# Altium PCB Motherboard.PcbDoc (part 2 of 2)
Units mm, origin at the board's own origin, x right, y up, seen from the top; angles counter-clockwise.
Board outline 131 x 71 mm, 4 copper layers (Top Layer, Power, Ground, Bottom Layer), stack 0.603 mm thick; 135 components, 79 nets, 354 pads, 162 vias.
Unrouted connection lines stored in the file: 81.
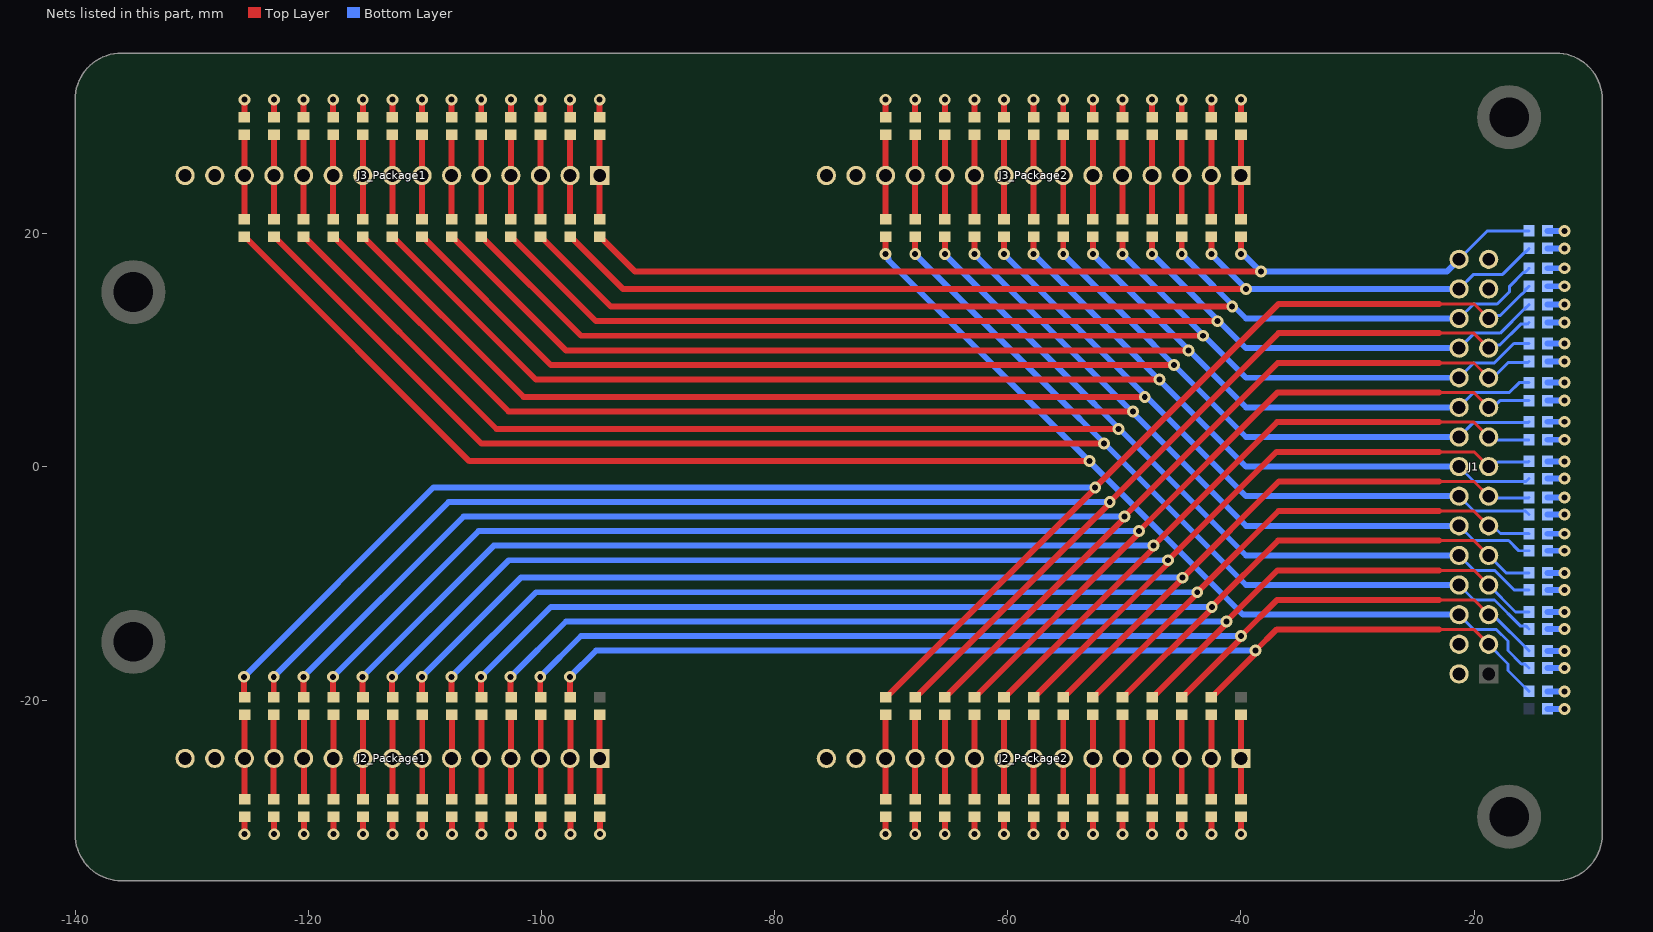
[diagram p3: the nets of this part, all layers, seen from the top]

## Via types
v1: diameter 1.016, hole 0.508, Top Layer to Bottom Layer, tented both sides, 162 vias

## Nets (pads, with @x,y where several pads share a name; then routed paths per layer and width w, separated by ;. In a path a pad name is that pad's centre, name@x,y a point inside that pad or via, vN(x,y) a via of type N, cw(c..) or ccw(c..) an arc to the next point about the centre after c; other vN are vias at no path point) (continued)
Decap_In2: C1_Decaps2.1 J1.3 R1_Resistors2.1 R1_Resistors28.1 | length 93.6
  Top Layer w0.254: -23,-13.925 -20.035,-13.925 J1.3@-18.75,-15.21
  Top Layer w0.508: R1_Resistors2.1@-97.56,-19.5 v1(-97.56,-18) ; R1_Resistors28.1@-42.54,-19.75 -42.49,-19.75 -38.847,-16.107 -38.847,-15.847 v1(-38.75,-15.75) -36.925,-13.925 -23,-13.925
  Bottom Layer w0.254: J1.3@-18.75,-15.233 -17.089,-16.893 -17.089,-17.462 -15.674,-18.877 -15.648,-18.877 -15.311,-19.214 C1_Decaps2.1@-15.311,-19.25
  Bottom Layer w0.508: v1(-97.56,-18) -95.31,-15.75 v1(-38.75,-15.75)
Decap_In3: C1_Decaps3.1 J1.5 R1_Resistors3.1 R1_Resistors29.1 | length 98.3
  Top Layer w0.254: -23,-11.398 -20.022,-11.398 J1.5@-18.75,-12.67
  Top Layer w0.508: R1_Resistors3.1@-100.1,-19.5 v1(-100.1,-18) ; R1_Resistors29.1@-45.08,-19.75 -45.03,-19.75 -40.097,-14.817 -40.097,-14.597 v1(-40,-14.5) -36.898,-11.398 -23,-11.398
  Bottom Layer w0.254: J1.5@-18.75,-12.67 -18.397,-12.67 -15.3,-15.767 C1_Decaps3.1@-15.3,-15.792
  Bottom Layer w0.508: v1(-100.1,-18) -96.6,-14.5 v1(-40,-14.5)
Decap_In4: C1_Decaps4.1 J1.7 R1_Resistors4.1 R1_Resistors30.1 | length 103.3
  Top Layer w0.254: -23,-8.868 -20.012,-8.868 J1.7@-18.75,-10.13
  Top Layer w0.508: R1_Resistors4.1@-102.64,-19.5 v1(-102.64,-18) ; R1_Resistors30.1@-47.62,-19.75 -47.57,-19.75 -41.347,-13.527 -41.347,-13.347 v1(-41.25,-13.25) -36.868,-8.868 -23,-8.868
  Bottom Layer w0.254: J1.7@-18.75,-10.13 -16.443,-12.437 C1_Decaps4.1@-15.3,-12.437
  Bottom Layer w0.508: v1(-102.64,-18) -97.89,-13.25 v1(-41.25,-13.25)
Decap_In5: C1_Decaps5.1 J1.9 R1_Resistors5.1 R1_Resistors31.1 | length 108.3
  Top Layer w0.254: -23,-6.316 -20.024,-6.316 J1.9@-18.75,-7.59
  Top Layer w0.508: R1_Resistors5.1@-105.18,-19.5 v1(-105.18,-18) ; R1_Resistors31.1@-50.16,-19.75 -50.11,-19.75 -42.597,-12.237 -42.597,-12.097 v1(-42.5,-12) -36.816,-6.316 -23,-6.316
  Bottom Layer w0.254: J1.9@-18.75,-7.59 -17.257,-9.083 C1_Decaps5.1@-15.3,-9.083
  Bottom Layer w0.508: v1(-105.18,-18) -99.18,-12 v1(-42.5,-12)
Decap_In6: C1_Decaps6.1 J1.11 R1_Resistors6.1 R1_Resistors32.1 | length 113.4
  Top Layer w0.254: -23,-3.774 -20.026,-3.774 J1.11@-18.75,-5.05
  Top Layer w0.508: R1_Resistors6.1@-107.72,-19.5 v1(-107.72,-18) ; R1_Resistors32.1@-52.7,-19.75 -52.65,-19.75 -43.75,-10.85 v1(-43.75,-10.75) -36.774,-3.774 -23,-3.774
  Bottom Layer w0.254: J1.11@-18.75,-5.05 -18.403,-5.05 -17.748,-5.704 -15.325,-5.704 C1_Decaps6.1@-15.3,-5.729
  Bottom Layer w0.508: v1(-107.72,-18) -100.47,-10.75 v1(-43.75,-10.75)
Decap_In7: C1_Decaps7.1 J1.13 R1_Resistors7.1 R1_Resistors33.1 | length 118.5
  Top Layer w0.254: -23,-1.244 -20.016,-1.244 J1.13@-18.75,-2.51
  Top Layer w0.508: R1_Resistors7.1@-110.26,-19.5 v1(-110.26,-18) ; R1_Resistors33.1@-55.24,-19.75 -55.19,-19.75 -45,-9.56 v1(-45,-9.5) -36.744,-1.244 -23,-1.244
  Bottom Layer w0.254: J1.13@-18.75,-2.51 -18.583,-2.677 -15.352,-2.677 C1_Decaps7.1@-15.3,-2.625
  Bottom Layer w0.508: v1(-110.26,-18) -101.76,-9.5 v1(-45,-9.5)
Decap_In8: C1_Decaps8.1 J1.15 R1_Resistors8.1 R1_Resistors34.1 | length 124.3
  Top Layer w0.254: -23,1.297 -20.017,1.297 J1.15@-18.75,0.03
  Top Layer w0.508: R1_Resistors8.1@-112.8,-19.5 v1(-112.8,-18) ; R1_Resistors34.1@-57.78,-19.75 -57.73,-19.75 -46.347,-8.367 -46.347,-8.097 v1(-46.25,-8) -36.953,1.297 -23,1.297
  Bottom Layer w0.254: J1.15@-18.75,0.03 -18.372,0.03 -17.972,0.431 -15.348,0.431 C1_Decaps8.1@-15.3,0.479
  Bottom Layer w0.508: v1(-112.8,-18) -102.8,-8 v1(-46.25,-8)
Decap_In9: C1_Decaps9.1 J1.17 R1_Resistors9.1 R1_Resistors35.1 | length 129.5
  Top Layer w0.254: -23,3.838 -20.018,3.838 J1.17@-18.75,2.57
  Top Layer w0.508: R1_Resistors9.1@-115.34,-19.5 v1(-115.34,-18) ; R1_Resistors35.1@-60.32,-19.75 -60.27,-19.75 -47.597,-7.077 -47.597,-6.847 v1(-47.5,-6.75) -36.912,3.838 -23,3.838
  Bottom Layer w0.254: J1.17@-18.75,2.57 -18.498,2.318 C1_Decaps9.1@-15.316,2.318
  Bottom Layer w0.508: v1(-115.34,-18) -104.09,-6.75 v1(-47.5,-6.75)
Decap_In10: C1_Decaps10.1 J1.19 R1_Resistors10.1 R1_Resistors36.1 | length 135.1
  Top Layer w0.254: -23,6.368 -20.008,6.368 J1.19@-18.75,5.11
  Top Layer w0.508: R1_Resistors10.1@-117.88,-19.5 v1(-117.88,-18) ; R1_Resistors36.1@-62.86,-19.75 -62.81,-19.75 -48.847,-5.787 -48.847,-5.597 v1(-48.75,-5.5) -36.882,6.368 -23,6.368
  Bottom Layer w0.254: J1.19@-18.75,5.11 -18.372,5.11 -17.795,5.687 C1_Decaps10.1@-15.3,5.687
  Bottom Layer w0.508: v1(-117.88,-18) -105.38,-5.5 v1(-48.75,-5.5)
Decap_In11: C1_Decaps11.1 J1.21 R1_Resistors11.1 R1_Resistors37.1 | length 140.8
  Top Layer w0.254: -23,8.909 -20.009,8.909 J1.21@-18.75,7.65
  Top Layer w0.508: R1_Resistors11.1@-120.42,-19.5 v1(-120.42,-18) ; R1_Resistors37.1@-65.4,-19.75 -65.35,-19.75 -50.097,-4.497 -50.097,-4.347 v1(-50,-4.25) -36.841,8.909 -23,8.909
  Bottom Layer w0.254: J1.21@-18.75,7.65 -18.386,7.65 -17.073,8.963 -15.379,8.963 C1_Decaps11.1@-15.3,9.042
  Bottom Layer w0.508: v1(-120.42,-18) -106.67,-4.25 v1(-50,-4.25)
Decap_In12: C1_Decaps12.1 J1.23 R1_Resistors12.1 R1_Resistors38.1 | length 146.5
  Top Layer w0.254: -23,11.473 -20.033,11.473 J1.23@-18.75,10.19
  Top Layer w0.508: R1_Resistors12.1@-122.96,-19.5 v1(-122.96,-18) ; R1_Resistors38.1@-67.94,-19.75 -67.89,-19.75 -51.25,-3.11 v1(-51.25,-3) -36.777,11.473 -23,11.473
  Bottom Layer w0.254: J1.23@-18.75,10.19 -18.483,10.457 -17.793,10.457 -16.007,12.243 -15.453,12.243 C1_Decaps12.1@-15.3,12.396
  Bottom Layer w0.508: v1(-122.96,-18) -107.96,-3 v1(-51.25,-3)
Decap_In13: C1_Decaps13.1 J1.25 R1_Resistors13.1 R1_Resistors39.1 | length 152.2
  Top Layer w0.254: -23,13.991 -20.011,13.991 J1.25@-18.75,12.73
  Top Layer w0.508: R1_Resistors13.1@-125.5,-19.5 v1(-125.5,-18) ; R1_Resistors39.1@-70.48,-19.75 -70.43,-19.75 -52.5,-1.82 v1(-52.5,-1.75) -36.759,13.991 -23,13.991
  Bottom Layer w0.254: J1.25@-18.75,12.73 -18.483,12.997 -17.754,12.997 -15.933,14.818 -15.886,14.818 -15.648,15.056 -15.648,15.152 C1_Decaps13.1@-15.3,15.5
  Bottom Layer w0.508: v1(-125.5,-18) -109.25,-1.75 v1(-52.5,-1.75)
Decap_In14: C1_Decaps14.1 J1.30 R1_Resistors14.1 R1_Resistors40.1 | length 86.2
  Top Layer w0.508: R1_Resistors14.1@-95,19.75 -94.95,19.75 -91.95,16.75 v1(-38.294,16.75) ; v1(-40,18.25) R1_Resistors40.1@-40,19.75
  Bottom Layer w0.254: J1.30@-21.29,17.81 -18.85,20.25 C1_Decaps14.1@-15.3,20.25
  Bottom Layer w0.508: v1(-40,18.25) -39.794,18.25 v1(-38.294,16.75) -22.35,16.75 J1.30@-21.29,17.81
Decap_In15: C1_Decaps15.1 J1.28 R1_Resistors15.1 R1_Resistors41.1 | length 91.3
  Top Layer w0.508: R1_Resistors15.1@-97.54,19.75 -97.49,19.75 -93.01,15.27 v1(-39.56,15.27) ; v1(-42.54,18.25) R1_Resistors41.1@-42.54,19.75
  Bottom Layer w0.254: J1.28@-21.29,15.27 -20.038,16.522 -17.551,16.522 -15.696,18.377 -15.648,18.377 -15.3,18.725 C1_Decaps15.1@-15.3,18.748
  Bottom Layer w0.508: v1(-42.54,18.25) v1(-39.56,15.27) J1.28@-21.29,15.27
Decap_In16: C1_Decaps16.1 J1.26 R1_Resistors16.1 R1_Resistors42.1 | length 97.5
  Top Layer w0.508: R1_Resistors16.1@-100.08,19.75 -100.03,19.75 -94.03,13.75 v1(-40.75,13.75) ; v1(-45.08,18.25) R1_Resistors42.1@-45.08,19.75
  Bottom Layer w0.254: J1.26@-21.29,12.73 -20.038,13.982 -18.019,13.982 -16.954,15.047 -16.954,15.505 -15.79,16.669 -15.648,16.669 -15.3,17.017 C1_Decaps16.1@-15.3,17.042
  Bottom Layer w0.508: v1(-45.08,18.25) -39.56,12.73 J1.26@-21.29,12.73
Decap_In17: C1_Decaps17.1 J1.24 R1_Resistors17.1 R1_Resistors43.1 | length 102.3
  Top Layer w0.508: R1_Resistors17.1@-102.62,19.75 -102.57,19.75 -95.32,12.5 v1(-42,12.5) ; v1(-47.62,18.25) R1_Resistors43.1@-47.62,19.75
  Bottom Layer w0.254: J1.24@-21.29,10.19 -21.274,10.19 -19.995,11.469 -17.768,11.469 -15.673,13.564 -15.648,13.564 -15.3,13.912 C1_Decaps17.1@-15.3,13.937
  Bottom Layer w0.508: v1(-47.62,18.25) -39.56,10.19 J1.24@-21.29,10.19
Decap_In18: C1_Decaps18.1 J1.22 R1_Resistors18.1 R1_Resistors44.1 | length 107.4
  Top Layer w0.508: R1_Resistors18.1@-105.16,19.75 -105.11,19.75 -96.61,11.25 v1(-43.25,11.25) ; v1(-50.16,18.25) R1_Resistors44.1@-50.16,19.75
  Bottom Layer w0.254: J1.22@-21.29,7.65 -20.008,8.932 -18.246,8.932 -16.594,10.583 C1_Decaps18.1@-15.3,10.583
  Bottom Layer w0.508: v1(-50.16,18.25) -39.56,7.65 J1.22@-21.29,7.65
Decap_In19: C1_Decaps19.1 J1.20 R1_Resistors19.1 R1_Resistors45.1 | length 112.5
  Top Layer w0.508: R1_Resistors19.1@-107.7,19.75 -107.65,19.75 -97.9,10 v1(-44.5,10) ; v1(-52.7,18.25) R1_Resistors45.1@-52.7,19.75
  Bottom Layer w0.254: J1.20@-21.29,5.11 -20.022,6.378 -16.989,6.378 -16.137,7.229 C1_Decaps19.1@-15.3,7.229
  Bottom Layer w0.508: v1(-52.7,18.25) -39.56,5.11 J1.20@-21.29,5.11
Decap_In20: C1_Decaps20.1 J1.18 R1_Resistors20.1 R1_Resistors46.1 | length 117.5
  Top Layer w0.508: R1_Resistors20.1@-110.24,19.75 -110.19,19.75 -99.19,8.75 v1(-45.75,8.75) ; v1(-55.24,18.25) R1_Resistors46.1@-55.24,19.75
  Bottom Layer w0.254: J1.18@-21.29,2.57 -20.035,3.825 -15.35,3.825 C1_Decaps20.1@-15.3,3.875
  Bottom Layer w0.508: v1(-55.24,18.25) -39.56,2.57 J1.18@-21.29,2.57
Decap_In21: C1_Decaps21.1 J1.16 R1_Resistors21.1 R1_Resistors47.1 | length 123
  Top Layer w0.508: R1_Resistors21.1@-112.78,19.75 -112.73,19.75 -100.48,7.5 v1(-47,7.5) ; v1(-57.78,18.25) R1_Resistors47.1@-57.78,19.75
  Bottom Layer w0.254: J1.16@-21.29,0.03 -20.011,-1.249 -15.549,-1.249 C1_Decaps21.1@-15.3,-1
  Bottom Layer w0.508: v1(-57.78,18.25) -39.56,0.03 J1.16@-21.29,0.03
Decap_In22: C1_Decaps22.1 J1.14 R1_Resistors22.1 R1_Resistors48.1 | length 128.5
  Top Layer w0.508: R1_Resistors22.1@-115.32,19.75 -115.27,19.75 -101.52,6 v1(-48.25,6) ; v1(-60.32,18.25) R1_Resistors48.1@-60.32,19.75
  Bottom Layer w0.254: J1.14@-21.29,-2.51 -20.022,-3.778 -15.605,-3.778 C1_Decaps22.1@-15.3,-4.083
  Bottom Layer w0.508: v1(-60.32,18.25) -39.56,-2.51 J1.14@-21.29,-2.51
Decap_In23: C1_Decaps23.1 J1.12 R1_Resistors23.1 R1_Resistors49.1 | length 134.4
  Top Layer w0.508: R1_Resistors23.1@-117.86,19.75 -117.81,19.75 -102.81,4.75 v1(-49.25,4.75) ; v1(-62.86,18.25) R1_Resistors49.1@-62.86,19.75
  Bottom Layer w0.254: J1.12@-21.29,-5.05 -20.022,-6.318 -17.04,-6.318 -16.171,-7.188 C1_Decaps23.1@-15.3,-7.188
  Bottom Layer w0.508: v1(-62.86,18.25) -39.56,-5.05 J1.12@-21.29,-5.05
Decap_In24: C1_Decaps24.1 J1.10 R1_Resistors24.1 R1_Resistors50.1 | length 140.3
  Top Layer w0.508: R1_Resistors24.1@-120.4,19.75 -120.35,19.75 -103.85,3.25 v1(-50.5,3.25) ; v1(-65.4,18.25) R1_Resistors50.1@-65.4,19.75
  Bottom Layer w0.254: J1.10@-21.29,-7.59 -20.011,-8.869 -18.245,-8.869 -16.572,-10.542 C1_Decaps24.1@-15.3,-10.542
  Bottom Layer w0.508: v1(-65.4,18.25) -39.56,-7.59 J1.10@-21.29,-7.59
Decap_In25: C1_Decaps25.1 J1.8 R1_Resistors25.1 R1_Resistors51.1 | length 146
  Top Layer w0.508: R1_Resistors25.1@-122.94,19.75 -122.89,19.75 -105.14,2 v1(-51.75,2) ; v1(-67.94,18.25) R1_Resistors51.1@-67.94,19.75
  Bottom Layer w0.254: J1.8@-21.29,-10.13 -20.012,-11.408 -18.26,-11.408 -16.007,-13.661 -15.535,-13.661 C1_Decaps25.1@-15.3,-13.896
  Bottom Layer w0.508: v1(-67.94,18.25) -39.56,-10.13 J1.8@-21.29,-10.13
Decap_In26: C1_Decaps26.1 J1.6 R1_Resistors26.1 R1_Resistors52.1 | length 152.5
  Top Layer w0.508: R1_Resistors26.1@-125.48,19.75 -125.43,19.75 -106.18,0.5 v1(-53,0.5) ; v1(-70.48,18.25) R1_Resistors52.1@-70.48,19.75
  Bottom Layer w0.254: J1.6@-21.29,-12.67 -20.026,-13.934 -18.094,-13.934 -17.092,-14.936 -17.092,-15.752 -15.95,-16.894 -15.648,-16.894 -15.3,-17.242 C1_Decaps26.1@-15.3,-17.25
  Bottom Layer w0.508: v1(-70.48,18.25) -70.48,18.113 -70.226,17.859 -70.226,17.726 v1(-53,0.5) -39.83,-12.67 J1.6@-21.29,-12.67
GND: C1_Decaps1.2 C1_Decaps2.2 C1_Decaps3.2 C1_Decaps4.2 C1_Decaps5.2 C1_Decaps6.2 C1_Decaps7.2 C1_Decaps8.2 C1_Decaps9.2 C1_Decaps10.2 C1_Decaps11.2 C1_Decaps12.2 C1_Decaps13.2 C1_Decaps14.2 C1_Decaps15.2 C1_Decaps16.2 C1_Decaps17.2 C1_Decaps18.2 C1_Decaps19.2 C1_Decaps20.2 C1_Decaps21.2 C1_Decaps22.2 C1_Decaps23.2 C1_Decaps24.2 C1_Decaps25.2 C1_Decaps26.2 J1.2 J1.4 J1.27 J1.29 J2_Package1.14 J2_Package1.15 J2_Package2.14 J2_Package2.15 J3_Package1.14 J3_Package1.15 J3_Package2.14 J3_Package2.15 R2_Resistors1.2 R2_Resistors2.2 R2_Resistors3.2 R2_Resistors4.2 R2_Resistors5.2 R2_Resistors6.2 R2_Resistors7.2 R2_Resistors8.2 R2_Resistors9.2 R2_Resistors10.2 R2_Resistors11.2 R2_Resistors12.2 R2_Resistors13.2 R2_Resistors14.2 R2_Resistors15.2 R2_Resistors16.2 R2_Resistors17.2 R2_Resistors18.2 R2_Resistors19.2 R2_Resistors20.2 R2_Resistors21.2 R2_Resistors22.2 R2_Resistors23.2 R2_Resistors24.2 R2_Resistors25.2 R2_Resistors26.2 R2_Resistors27.2 R2_Resistors28.2 R2_Resistors29.2 R2_Resistors30.2 R2_Resistors31.2 R2_Resistors32.2 R2_Resistors33.2 R2_Resistors34.2 R2_Resistors35.2 R2_Resistors36.2 R2_Resistors37.2 R2_Resistors38.2 R2_Resistors39.2 R2_Resistors40.2 R2_Resistors41.2 R2_Resistors42.2 R2_Resistors43.2 R2_Resistors44.2 R2_Resistors45.2 R2_Resistors46.2 R2_Resistors47.2 R2_Resistors48.2 R2_Resistors49.2 R2_Resistors50.2 R2_Resistors51.2 R2_Resistors52.2 | length 115.7
  Top Layer w0.508: R2_Resistors26.2@-125.48,30 v1(-125.48,31.5) ; v1(-125.459,-31.5) R2_Resistors13.2@-125.459,-30 ; R2_Resistors25.2@-122.94,30 v1(-122.94,31.5) ; v1(-122.919,-31.5) R2_Resistors12.2@-122.919,-30 ; R2_Resistors24.2@-120.4,30 v1(-120.4,31.5) ; v1(-120.379,-31.5) R2_Resistors11.2@-120.379,-30 ; R2_Resistors23.2@-117.86,30 v1(-117.86,31.5) ; v1(-117.839,-31.5) R2_Resistors10.2@-117.839,-30 ; R2_Resistors22.2@-115.32,30 v1(-115.32,31.5) ; v1(-115.299,-31.5) R2_Resistors9.2@-115.299,-30 ; R2_Resistors21.2@-112.78,30 v1(-112.78,31.5) ; v1(-112.759,-31.5) R2_Resistors8.2@-112.759,-30 ; R2_Resistors20.2@-110.24,30 v1(-110.24,31.5) ; v1(-110.219,-31.5) R2_Resistors7.2@-110.219,-30 ; R2_Resistors19.2@-107.7,30 v1(-107.7,31.5) ; v1(-107.679,-31.5) R2_Resistors6.2@-107.679,-30 ; R2_Resistors18.2@-105.16,30 v1(-105.16,31.5) ; v1(-105.139,-31.5) R2_Resistors5.2@-105.139,-30 ; R2_Resistors17.2@-102.62,30 v1(-102.62,31.5) ; v1(-102.599,-31.5) R2_Resistors4.2@-102.599,-30 ; R2_Resistors16.2@-100.08,30 v1(-100.08,31.5) ; v1(-100.059,-31.5) R2_Resistors3.2@-100.059,-30 ; R2_Resistors15.2@-97.54,30 v1(-97.54,31.5) ; v1(-97.519,-31.5) R2_Resistors2.2@-97.519,-30 ; R2_Resistors14.2@-95,30 v1(-95,31.5) ; v1(-94.979,-31.5) R2_Resistors1.2@-94.979,-30 ; v1(-70.48,-31.5) R2_Resistors39.2@-70.48,-30 ; R2_Resistors52.2@-70.48,30 v1(-70.48,31.5) ; v1(-67.94,-31.5) R2_Resistors38.2@-67.94,-30 ; R2_Resistors51.2@-67.94,30 v1(-67.94,31.5) ; v1(-65.4,-31.5) R2_Resistors37.2@-65.4,-30 ; R2_Resistors50.2@-65.4,30 v1(-65.4,31.5) ; v1(-62.86,-31.5) R2_Resistors36.2@-62.86,-30 ; R2_Resistors49.2@-62.86,30 v1(-62.86,31.5) ; v1(-60.32,-31.5) R2_Resistors35.2@-60.32,-30 ; R2_Resistors48.2@-60.32,30 v1(-60.32,31.5) ; v1(-57.78,-31.5) R2_Resistors34.2@-57.78,-30 ; R2_Resistors47.2@-57.78,30 v1(-57.78,31.5) ; v1(-55.24,-31.5) R2_Resistors33.2@-55.24,-30 ; R2_Resistors46.2@-55.24,30 v1(-55.24,31.5) ; v1(-52.7,-31.5) R2_Resistors32.2@-52.7,-30 ; R2_Resistors45.2@-52.7,30 v1(-52.7,31.5) ; v1(-50.16,-31.5) R2_Resistors31.2@-50.16,-30 ; R2_Resistors44.2@-50.16,30 v1(-50.16,31.5) ; v1(-47.62,-31.5) R2_Resistors30.2@-47.62,-30 ; R2_Resistors43.2@-47.62,30 v1(-47.62,31.5) ; v1(-45.08,-31.5) R2_Resistors29.2@-45.08,-30 ; R2_Resistors42.2@-45.08,30 v1(-45.08,31.5) ; v1(-42.54,-31.5) R2_Resistors28.2@-42.54,-30 ; R2_Resistors41.2@-42.54,30 v1(-42.54,31.5) ; v1(-40,-31.5) R2_Resistors27.2@-40,-30 ; R2_Resistors40.2@-40,30 v1(-40,31.5)
  Bottom Layer w0.508: C1_Decaps1.2@-13.7,-20.75 v1(-12.25,-20.75) ; C1_Decaps2.2@-13.7,-19.25 v1(-12.25,-19.25) ; C1_Decaps26.2@-13.7,-17.25 v1(-12.25,-17.25) ; C1_Decaps3.2@-13.7,-15.792 v1(-12.25,-15.792) ; C1_Decaps25.2@-13.7,-13.896 v1(-12.25,-13.896) ; C1_Decaps4.2@-13.7,-12.437 v1(-12.25,-12.437) ; C1_Decaps24.2@-13.7,-10.542 v1(-12.25,-10.542) ; C1_Decaps5.2@-13.7,-9.083 v1(-12.25,-9.083) ; C1_Decaps23.2@-13.7,-7.188 v1(-12.25,-7.187) ; C1_Decaps6.2@-13.7,-5.729 v1(-12.25,-5.729) ; C1_Decaps22.2@-13.7,-4.083 v1(-12.25,-4.083) ; C1_Decaps7.2@-13.7,-2.625 v1(-12.25,-2.625) ; C1_Decaps21.2@-13.7,-1 v1(-12.25,-1) ; C1_Decaps8.2@-13.7,0.479 v1(-12.25,0.479) ; C1_Decaps9.2@-13.7,2.333 v1(-12.25,2.333) ; C1_Decaps20.2@-13.7,3.875 v1(-12.25,3.875) ; C1_Decaps10.2@-13.7,5.687 v1(-12.25,5.688) ; C1_Decaps19.2@-13.7,7.229 v1(-12.25,7.229) ; C1_Decaps11.2@-13.7,9.042 v1(-12.25,9.042) ; C1_Decaps18.2@-13.7,10.583 v1(-12.25,10.583) ; C1_Decaps12.2@-13.7,12.396 v1(-12.25,12.396) ; C1_Decaps17.2@-13.7,13.937 v1(-12.25,13.937) ; C1_Decaps13.2@-13.7,15.5 v1(-12.25,15.5) ; C1_Decaps16.2@-13.7,17.042 v1(-12.25,17.042) ; C1_Decaps15.2@-13.7,18.75 v1(-12.25,18.75) ; C1_Decaps14.2@-13.7,20.25 v1(-12.25,20.25)
Package1_Package1: J2_Package1.1 R1_Resistors1.2 R2_Resistors1.1 | length 7.3
  Top Layer w0.508: R2_Resistors1.1@-95,-28.5 J2_Package1.1@-95,-25 R1_Resistors1.2@-95,-21.25
Package1_Package2: J2_Package2.1 R1_Resistors27.2 R2_Resistors27.1 | length 7.2
  Top Layer w0.508: R2_Resistors27.1@-40,-28.5 J2_Package2.1@-40,-25 R1_Resistors27.2@-40,-21.25
Package2_Package1: J2_Package1.2 R1_Resistors2.2 R2_Resistors2.1 | length 7.2
  Top Layer w0.508: R2_Resistors2.1@-97.519,-28.5 -97.519,-25 R1_Resistors2.2@-97.519,-21.25
Package2_Package2: J2_Package2.2 R1_Resistors28.2 R2_Resistors28.1 | length 7.2
  Top Layer w0.508: R2_Resistors28.1@-42.54,-28.5 J2_Package2.2@-42.54,-25 R1_Resistors28.2@-42.54,-21.25
Package3_Package1: J2_Package1.3 R1_Resistors3.2 R2_Resistors3.1 | length 7.2
  Top Layer w0.508: R2_Resistors3.1@-100.059,-28.5 -100.059,-25 R1_Resistors3.2@-100.059,-21.25
Package3_Package2: J2_Package2.3 R1_Resistors29.2 R2_Resistors29.1 | length 7.2
  Top Layer w0.508: R2_Resistors29.1@-45.08,-28.5 J2_Package2.3@-45.08,-25 R1_Resistors29.2@-45.08,-21.25
Package4_Package1: J2_Package1.4 R1_Resistors4.2 R2_Resistors4.1 | length 7.2
  Top Layer w0.508: R2_Resistors4.1@-102.599,-28.5 -102.599,-25 R1_Resistors4.2@-102.599,-21.25
Package4_Package2: J2_Package2.4 R1_Resistors30.2 R2_Resistors30.1 | length 7.2
  Top Layer w0.508: R2_Resistors30.1@-47.62,-28.5 J2_Package2.4@-47.62,-25 R1_Resistors30.2@-47.62,-21.25
Package5_Package1: J2_Package1.5 R1_Resistors5.2 R2_Resistors5.1 | length 7.2
  Top Layer w0.508: R2_Resistors5.1@-105.139,-28.5 -105.139,-25 R1_Resistors5.2@-105.139,-21.25
Package5_Package2: J2_Package2.5 R1_Resistors31.2 R2_Resistors31.1 | length 7.2
  Top Layer w0.508: R2_Resistors31.1@-50.16,-28.5 J2_Package2.5@-50.16,-25 R1_Resistors31.2@-50.16,-21.25
Package6_Package1: J2_Package1.6 R1_Resistors6.2 R2_Resistors6.1 | length 7.2
  Top Layer w0.508: R2_Resistors6.1@-107.679,-28.5 -107.679,-25 R1_Resistors6.2@-107.679,-21.25
Package6_Package2: J2_Package2.6 R1_Resistors32.2 R2_Resistors32.1 | length 7.2
  Top Layer w0.508: R2_Resistors32.1@-52.7,-28.5 J2_Package2.6@-52.7,-25 R1_Resistors32.2@-52.7,-21.25
Package7_Package1: J2_Package1.7 R1_Resistors7.2 R2_Resistors7.1 | length 7.2
  Top Layer w0.508: R2_Resistors7.1@-110.219,-28.5 -110.219,-25 R1_Resistors7.2@-110.219,-21.25
Package7_Package2: J2_Package2.7 R1_Resistors33.2 R2_Resistors33.1 | length 7.2
  Top Layer w0.508: R2_Resistors33.1@-55.24,-28.5 J2_Package2.7@-55.24,-25 R1_Resistors33.2@-55.24,-21.25
Package8_Package1: J2_Package1.8 R1_Resistors8.2 R2_Resistors8.1 | length 7.2
  Top Layer w0.508: R2_Resistors8.1@-112.759,-28.5 -112.759,-25 R1_Resistors8.2@-112.759,-21.25
Package8_Package2: J2_Package2.8 R1_Resistors34.2 R2_Resistors34.1 | length 7.2
  Top Layer w0.508: R2_Resistors34.1@-57.78,-28.5 J2_Package2.8@-57.78,-25 R1_Resistors34.2@-57.78,-21.25
Package9_Package1: J2_Package1.9 R1_Resistors9.2 R2_Resistors9.1 | length 7.2
  Top Layer w0.508: R2_Resistors9.1@-115.299,-28.5 -115.299,-25 R1_Resistors9.2@-115.299,-21.25
Package9_Package2: J2_Package2.9 R1_Resistors35.2 R2_Resistors35.1 | length 7.2
  Top Layer w0.508: R2_Resistors35.1@-60.32,-28.5 J2_Package2.9@-60.32,-25 R1_Resistors35.2@-60.32,-21.25
Package10_Package1: J2_Package1.10 R1_Resistors10.2 R2_Resistors10.1 | length 7.2
  Top Layer w0.508: R2_Resistors10.1@-117.839,-28.5 -117.839,-25 R1_Resistors10.2@-117.839,-21.25
Package10_Package2: J2_Package2.10 R1_Resistors36.2 R2_Resistors36.1 | length 7.2
  Top Layer w0.508: R2_Resistors36.1@-62.86,-28.5 J2_Package2.10@-62.86,-25 R1_Resistors36.2@-62.86,-21.25
Package11_Package1: J2_Package1.11 R1_Resistors11.2 R2_Resistors11.1 | length 7.2
  Top Layer w0.508: R2_Resistors11.1@-120.379,-28.5 -120.379,-25 R1_Resistors11.2@-120.379,-21.25
Package11_Package2: J2_Package2.11 R1_Resistors37.2 R2_Resistors37.1 | length 7.2
  Top Layer w0.508: R2_Resistors37.1@-65.4,-28.5 J2_Package2.11@-65.4,-25 R1_Resistors37.2@-65.4,-21.25
Package12_Package1: J2_Package1.12 R1_Resistors12.2 R2_Resistors12.1 | length 7.2
  Top Layer w0.508: R2_Resistors12.1@-122.967,-28.5 -122.967,-25 R1_Resistors12.2@-122.967,-21.25
Package12_Package2: J2_Package2.12 R1_Resistors38.2 R2_Resistors38.1 | length 7.2
  Top Layer w0.508: R2_Resistors38.1@-67.94,-28.5 J2_Package2.12@-67.94,-25 R1_Resistors38.2@-67.94,-21.25
Package13_Package1: J2_Package1.13 R1_Resistors13.2 R2_Resistors13.1 | length 7.2
  Top Layer w0.508: R2_Resistors13.1@-125.459,-28.5 -125.459,-25 R1_Resistors13.2@-125.459,-21.25
Package13_Package2: J2_Package2.13 R1_Resistors39.2 R2_Resistors39.1 | length 7.2
  Top Layer w0.508: R2_Resistors39.1@-70.48,-28.5 J2_Package2.13@-70.48,-25 R1_Resistors39.2@-70.48,-21.25
Package14_Package1: J3_Package1.1 R1_Resistors14.2 R2_Resistors14.1 | length 7.2
  Top Layer w0.508: R1_Resistors14.2@-95,21.25 J3_Package1.1@-95,25 R2_Resistors14.1@-95,28.5
Package14_Package2: J3_Package2.1 R1_Resistors40.2 R2_Resistors40.1 | length 7.2
  Top Layer w0.508: R1_Resistors40.2@-40,21.25 J3_Package2.1@-40,25 R2_Resistors40.1@-40,28.5
Package15_Package1: J3_Package1.2 R1_Resistors15.2 R2_Resistors15.1 | length 7.2
  Top Layer w0.508: R1_Resistors15.2@-97.54,21.25 J3_Package1.2@-97.54,25 R2_Resistors15.1@-97.54,28.5
Package15_Package2: J3_Package2.2 R1_Resistors41.2 R2_Resistors41.1 | length 7.2
  Top Layer w0.508: R1_Resistors41.2@-42.54,21.25 J3_Package2.2@-42.54,25 R2_Resistors41.1@-42.54,28.5
Package16_Package1: J3_Package1.3 R1_Resistors16.2 R2_Resistors16.1 | length 7.2
  Top Layer w0.508: R1_Resistors16.2@-100.08,21.25 J3_Package1.3@-100.08,25 R2_Resistors16.1@-100.08,28.5
Package16_Package2: J3_Package2.3 R1_Resistors42.2 R2_Resistors42.1 | length 7.2
  Top Layer w0.508: R1_Resistors42.2@-45.08,21.25 J3_Package2.3@-45.08,25 R2_Resistors42.1@-45.08,28.5
Package17_Package1: J3_Package1.4 R1_Resistors17.2 R2_Resistors17.1 | length 7.2
  Top Layer w0.508: R1_Resistors17.2@-102.62,21.25 J3_Package1.4@-102.62,25 R2_Resistors17.1@-102.62,28.5
Package17_Package2: J3_Package2.4 R1_Resistors43.2 R2_Resistors43.1 | length 7.2
  Top Layer w0.508: R1_Resistors43.2@-47.62,21.25 J3_Package2.4@-47.62,25 R2_Resistors43.1@-47.62,28.5
Package18_Package1: J3_Package1.5 R1_Resistors18.2 R2_Resistors18.1 | length 7.2
  Top Layer w0.508: R1_Resistors18.2@-105.16,21.25 J3_Package1.5@-105.16,25 R2_Resistors18.1@-105.16,28.5
Package18_Package2: J3_Package2.5 R1_Resistors44.2 R2_Resistors44.1 | length 7.2
  Top Layer w0.508: R1_Resistors44.2@-50.16,21.25 J3_Package2.5@-50.16,25 R2_Resistors44.1@-50.16,28.5
Package19_Package1: J3_Package1.6 R1_Resistors19.2 R2_Resistors19.1 | length 7.2
  Top Layer w0.508: R1_Resistors19.2@-107.7,21.25 J3_Package1.6@-107.7,25 R2_Resistors19.1@-107.7,28.5
Package19_Package2: J3_Package2.6 R1_Resistors45.2 R2_Resistors45.1 | length 7.2
  Top Layer w0.508: R1_Resistors45.2@-52.7,21.25 J3_Package2.6@-52.7,25 R2_Resistors45.1@-52.7,28.5
Package20_Package1: J3_Package1.7 R1_Resistors20.2 R2_Resistors20.1 | length 7.2
  Top Layer w0.508: R1_Resistors20.2@-110.24,21.25 J3_Package1.7@-110.24,25 R2_Resistors20.1@-110.24,28.5
Package20_Package2: J3_Package2.7 R1_Resistors46.2 R2_Resistors46.1 | length 7.2
  Top Layer w0.508: R1_Resistors46.2@-55.24,21.25 J3_Package2.7@-55.24,25 R2_Resistors46.1@-55.24,28.5
Package21_Package1: J3_Package1.8 R1_Resistors21.2 R2_Resistors21.1 | length 7.2
  Top Layer w0.508: R1_Resistors21.2@-112.78,21.25 J3_Package1.8@-112.78,25 R2_Resistors21.1@-112.78,28.5
Package21_Package2: J3_Package2.8 R1_Resistors47.2 R2_Resistors47.1 | length 7.2
  Top Layer w0.508: R1_Resistors47.2@-57.78,21.25 J3_Package2.8@-57.78,25 R2_Resistors47.1@-57.78,28.5
Package22_Package1: J3_Package1.9 R1_Resistors22.2 R2_Resistors22.1 | length 7.2
  Top Layer w0.508: R1_Resistors22.2@-115.32,21.25 J3_Package1.9@-115.32,25 R2_Resistors22.1@-115.32,28.5
Package22_Package2: J3_Package2.9 R1_Resistors48.2 R2_Resistors48.1 | length 7.2
  Top Layer w0.508: R1_Resistors48.2@-60.32,21.25 J3_Package2.9@-60.32,25 R2_Resistors48.1@-60.32,28.5
Package23_Package1: J3_Package1.10 R1_Resistors23.2 R2_Resistors23.1 | length 7.2
  Top Layer w0.508: R1_Resistors23.2@-117.86,21.25 J3_Package1.10@-117.86,25 R2_Resistors23.1@-117.86,28.5
Package23_Package2: J3_Package2.10 R1_Resistors49.2 R2_Resistors49.1 | length 7.2
  Top Layer w0.508: R1_Resistors49.2@-62.86,21.25 J3_Package2.10@-62.86,25 R2_Resistors49.1@-62.86,28.5
Package24_Package1: J3_Package1.11 R1_Resistors24.2 R2_Resistors24.1 | length 7.2
  Top Layer w0.508: R1_Resistors24.2@-120.4,21.25 J3_Package1.11@-120.4,25 R2_Resistors24.1@-120.4,28.5
Package24_Package2: J3_Package2.11 R1_Resistors50.2 R2_Resistors50.1 | length 7.2
  Top Layer w0.508: R1_Resistors50.2@-65.4,21.25 J3_Package2.11@-65.4,25 R2_Resistors50.1@-65.4,28.5
Package25_Package1: J3_Package1.12 R1_Resistors25.2 R2_Resistors25.1 | length 7.2
  Top Layer w0.508: R1_Resistors25.2@-122.94,21.25 J3_Package1.12@-122.94,25 R2_Resistors25.1@-122.94,28.5
Package25_Package2: J3_Package2.12 R1_Resistors51.2 R2_Resistors51.1 | length 7.2
  Top Layer w0.508: R1_Resistors51.2@-67.94,21.25 J3_Package2.12@-67.94,25 R2_Resistors51.1@-67.94,28.5
Package26_Package1: J3_Package1.13 R1_Resistors26.2 R2_Resistors26.1 | length 7.2
  Top Layer w0.508: R1_Resistors26.2@-125.48,21.25 J3_Package1.13@-125.48,25 R2_Resistors26.1@-125.48,28.5
Package26_Package2: J3_Package2.13 R1_Resistors52.2 R2_Resistors52.1 | length 7.2
  Top Layer w0.508: R1_Resistors52.2@-70.48,21.25 J3_Package2.13@-70.48,25 R2_Resistors52.1@-70.48,28.5
copper on no net:
  other v1: -17,-32.25 -18.5,-31.5 -15.5,-31.5 -19.25,-30 -14.75,-30 -18.5,-28.5 -15.5,-28.5 -17,-27.75 -135,-17.25 -136.5,-16.5 -133.5,-16.5 -137.25,-15 -132.75,-15 -136.5,-13.5 -133.5,-13.5 -135,-12.75 -135,12.75 -136.5,13.5 -133.5,13.5 -137.25,15 -132.75,15 -136.5,16.5 -133.5,16.5 -135,17.25 -17,27.75 -18.5,28.5 -15.5,28.5 -19.25,30 -14.75,30 -18.5,31.5 -15.5,31.5 -17,32.25

## Polygon pours and split planes (outlines as drawn)
GND on Ground "NONET_L-01_P-001" (solid, pour order 0): -139.25,-29.75 -139.25,31.5 -135.998,34.752 -13,34.25 -10.25,31.5 -10.25,-31 -13.994,-34.744 -134.992,-34.008

## Keep-outs
Keep-Out Layer:
  lines w0.254: -9,-31.5 cw(c-13,-31.5) -13,-35.5 -136,-35.5 cw(c-136,-31.5) -140,-31.5 -140,31.5 cw(c-136,31.5) -136,35.5 -13,35.5 cw(c-13,31.5) -9,31.5 -9,-31.5 ; -9,-31.5 -9,-31.5

## Silkscreen, mask and mechanical layers (free items; w line width, h text height)
Top Overlay:
  drawing of 10 lines, arcs and shapes, not listed
  text "GND" at -130.809,32.691 h1
  text "26" at -126.809,32.69 h1
  text "25" at -124.129,32.69 h1
  text "24" at -121.448,32.69 h1
  text "23" at -118.768,32.69 h1
  text "22" at -116.087,32.69 h1
  text "21" at -113.407,32.69 h1
  text "20" at -111.06,32.69 h1
  text "19" at -108.379,32.69 h1
  text "18" at -105.865,32.69 h1
  text "17" at -103.351,32.69 h1
  text "16" at -100.837,32.69 h1
  text "15" at -98.323,32.69 h1
  text "14" at -95.81,32.69 h1
  text "GND" at -75.81,32.691 h1
  text "26" at -71.81,32.69 h1
  text "25" at -69.129,32.69 h1
  text "24" at -66.448,32.69 h1
  text "23" at -63.768,32.69 h1
  text "22" at -61.087,32.69 h1
  text "21" at -58.407,32.69 h1
  text "20" at -56.06,32.69 h1
  text "19" at -53.379,32.69 h1
  text "18" at -50.865,32.69 h1
  text "17" at -48.351,32.69 h1
  text "16" at -45.837,32.69 h1
  text "15" at -43.323,32.69 h1
  text "14" at -40.81,32.69 h1
  text "26 Pin DIP" at -34.746,23.004 h1.25
  text "Motherboard" at -34.746,20.504 h1.25
  text "14" at -31.476,17.19 h1
  text "GND" at -26.809,17.19 h1
  text "GND" at -26.809,14.69 h1
  text "15" at -31.476,14.649 h1
  text "13" at -26.226,12.19 h1
  text "16" at -31.476,12.107 h1
  text "12" at -26.226,9.649 h1
  text "17" at -31.476,9.565 h1
  text "11" at -26.226,7.107 h1
  text "18" at -31.476,7.024 h1
  text "10" at -26.226,4.565 h1
  text "19" at -31.476,4.482 h1
  text "9" at -26.226,2.024 h1
  text "20" at -31.476,1.94 h1
  text "8" at -26.226,-0.518 h1
  text "21" at -31.476,-0.601 h1
  text "7" at -26.226,-3.06 h1
  text "22" at -31.476,-3.143 h1
  text "6" at -26.226,-5.601 h1
  text "23" at -31.476,-5.685 h1
  text "5" at -26.226,-8.143 h1
  text "24" at -31.476,-8.226 h1
  text "4" at -26.226,-10.685 h1
  text "25" at -31.476,-10.768 h1
  text "3" at -26.226,-13.226 h1
  text "26" at -31.476,-13.31 h1
  text "2" at -26.226,-15.768 h1
  text "GND" at -32.059,-15.81 h1
  text "GND" at -32.059,-18.31 h1
  text "1" at -26.226,-18.31 h1
  text "James Lin :3" at -35.746,-23.746 h1.25
  text "GND" at -130.809,-33.309 h1
  text "13" at -126.06,-33.31 h1
  text "12" at -122.893,-33.31 h1
  text "11" at -119.727,-33.31 h1
  text "10" at -116.893,-33.31 h1
  text "9" at -113.727,-33.31 h1
  text "8" at -111.393,-33.31 h1
  text "7" at -109.06,-33.31 h1
  text "6" at -106.727,-33.31 h1
  text "5" at -104.393,-33.31 h1
  text "4" at -102.06,-33.31 h1
  text "3" at -99.726,-33.31 h1
  text "2" at -97.393,-33.31 h1
  text "1" at -95.06,-33.31 h1
  text "GND" at -75.56,-33.56 h1
  text "13" at -71.31,-33.559 h1
  text "12" at -68.143,-33.559 h1
  text "11" at -64.977,-33.559 h1
  text "10" at -62.143,-33.559 h1
  text "9" at -58.977,-33.559 h1
  text "8" at -56.643,-33.559 h1
  text "7" at -54.31,-33.559 h1
  text "6" at -51.977,-33.559 h1
  text "5" at -49.643,-33.559 h1
  text "4" at -47.31,-33.559 h1
  text "3" at -44.976,-33.559 h1
  text "2" at -42.643,-33.559 h1
  text "1" at -40.31,-33.559 h1
Bottom Overlay:
  drawing of 22 lines, arcs and shapes, not listed
Mechanical 13:
  lines w0.1: -59.941,21.515 -59.375,22.081 -58.279,20.985 -58.845,20.419 -59.941,21.515
Mechanical 15:
  lines w0.05: -61.035,27.194 -59.974,28.255 ; -60.666,21.745 -58.615,19.694 -57.554,20.755 -59.605,22.806